# EAGLE board AC_PCB_schem_v70 (EAGLE 9.7.0)
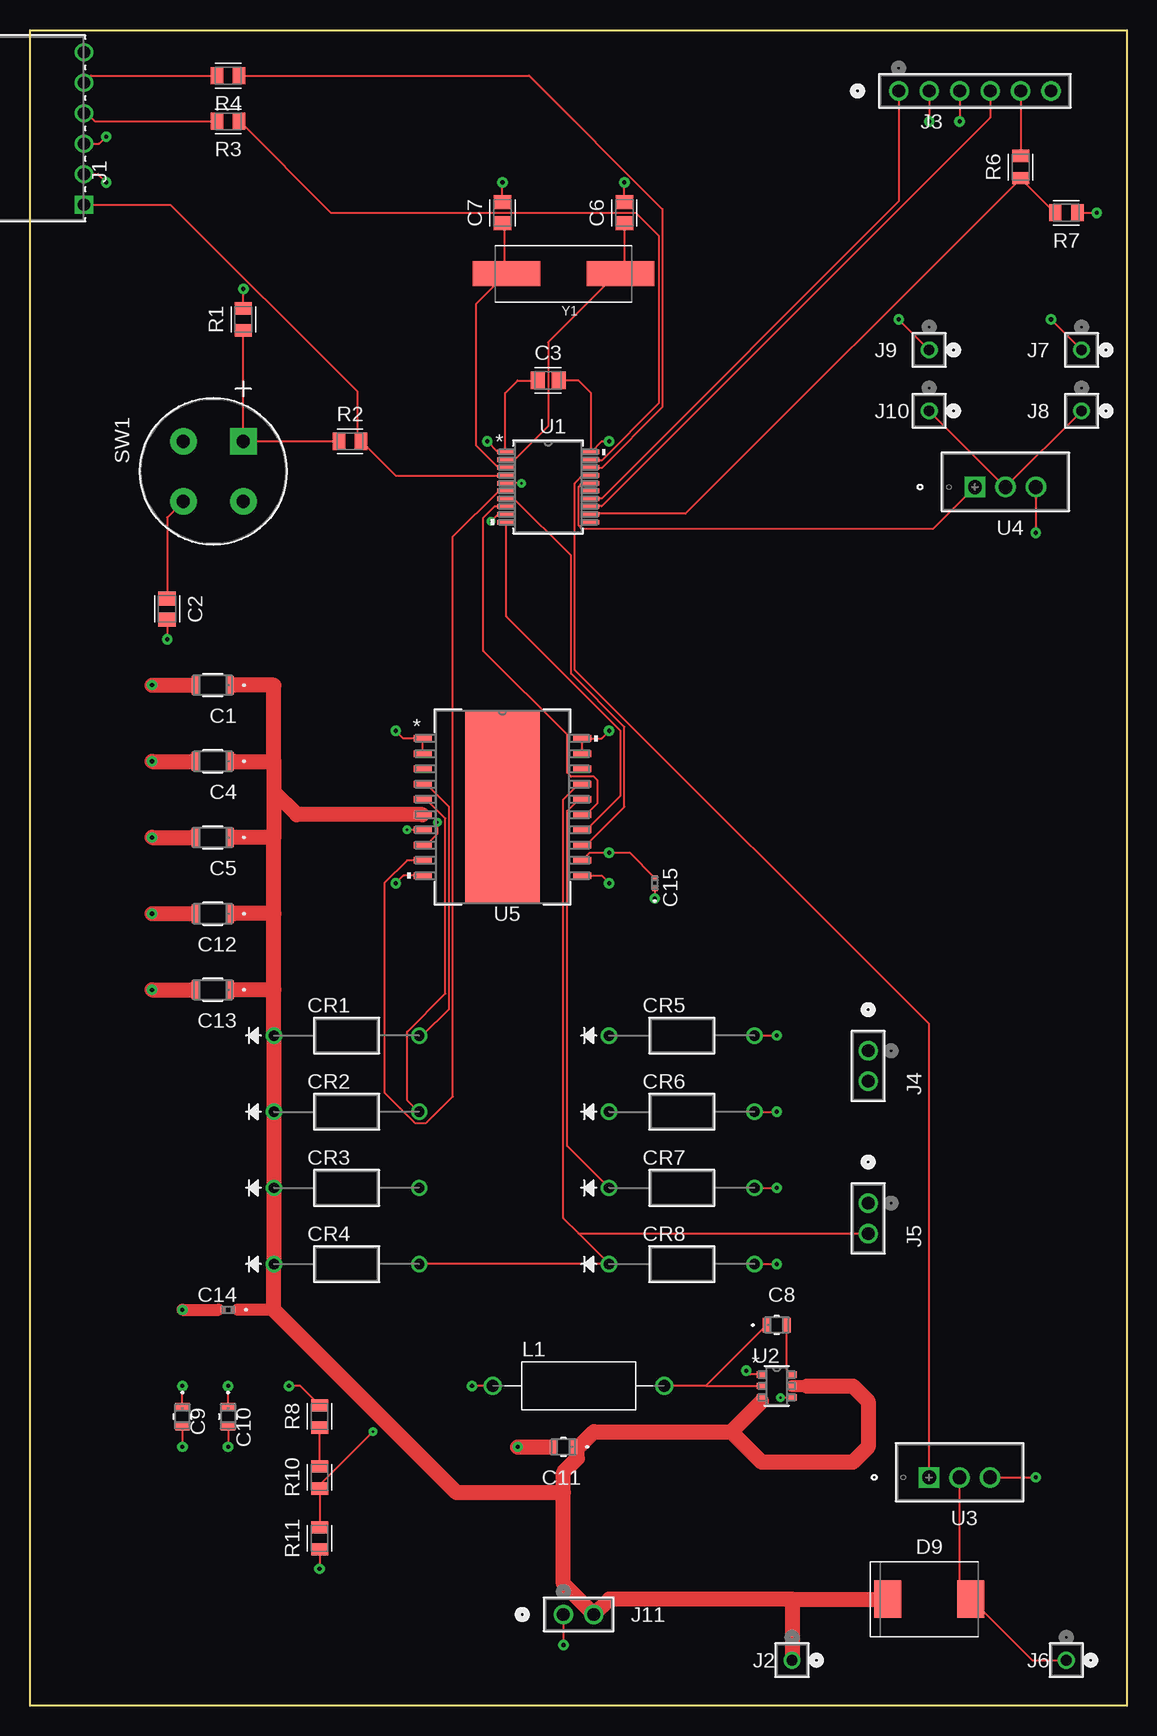
[diagram p0: board, top side]
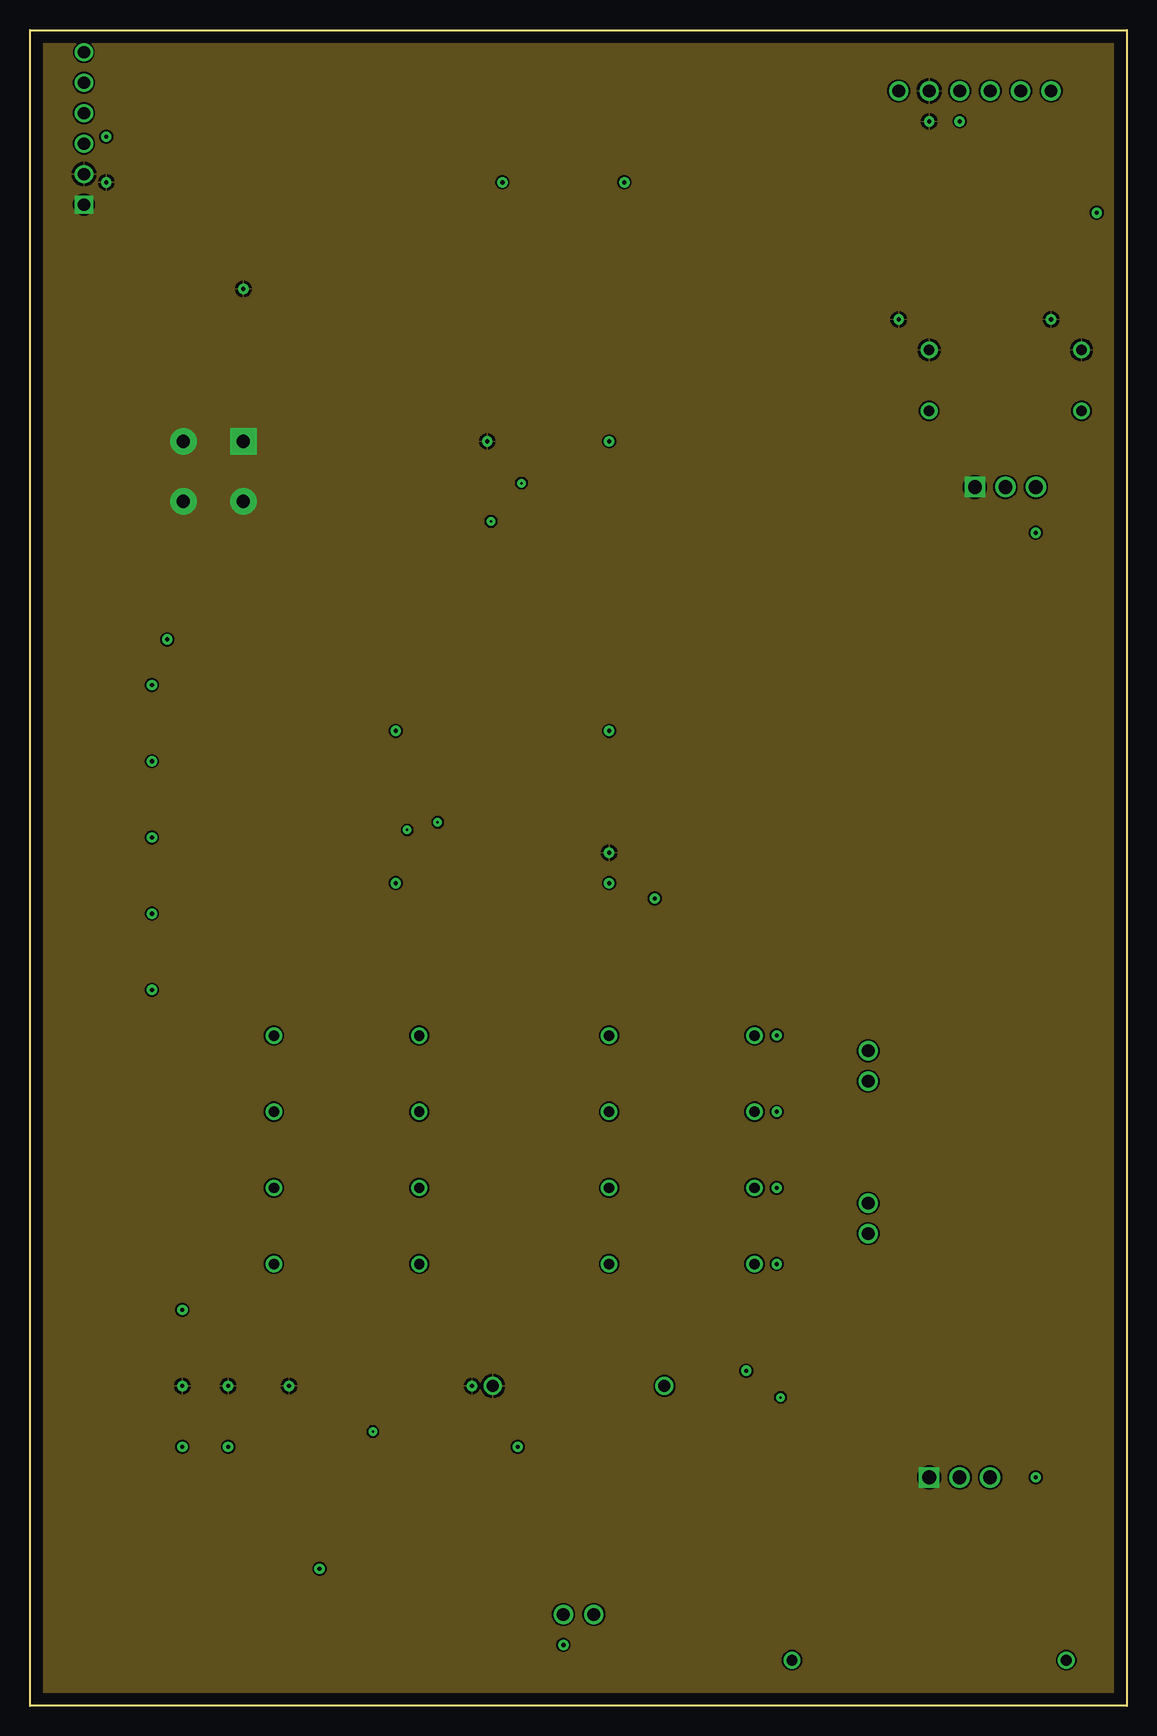
[diagram p1: board, inner layer P5V]
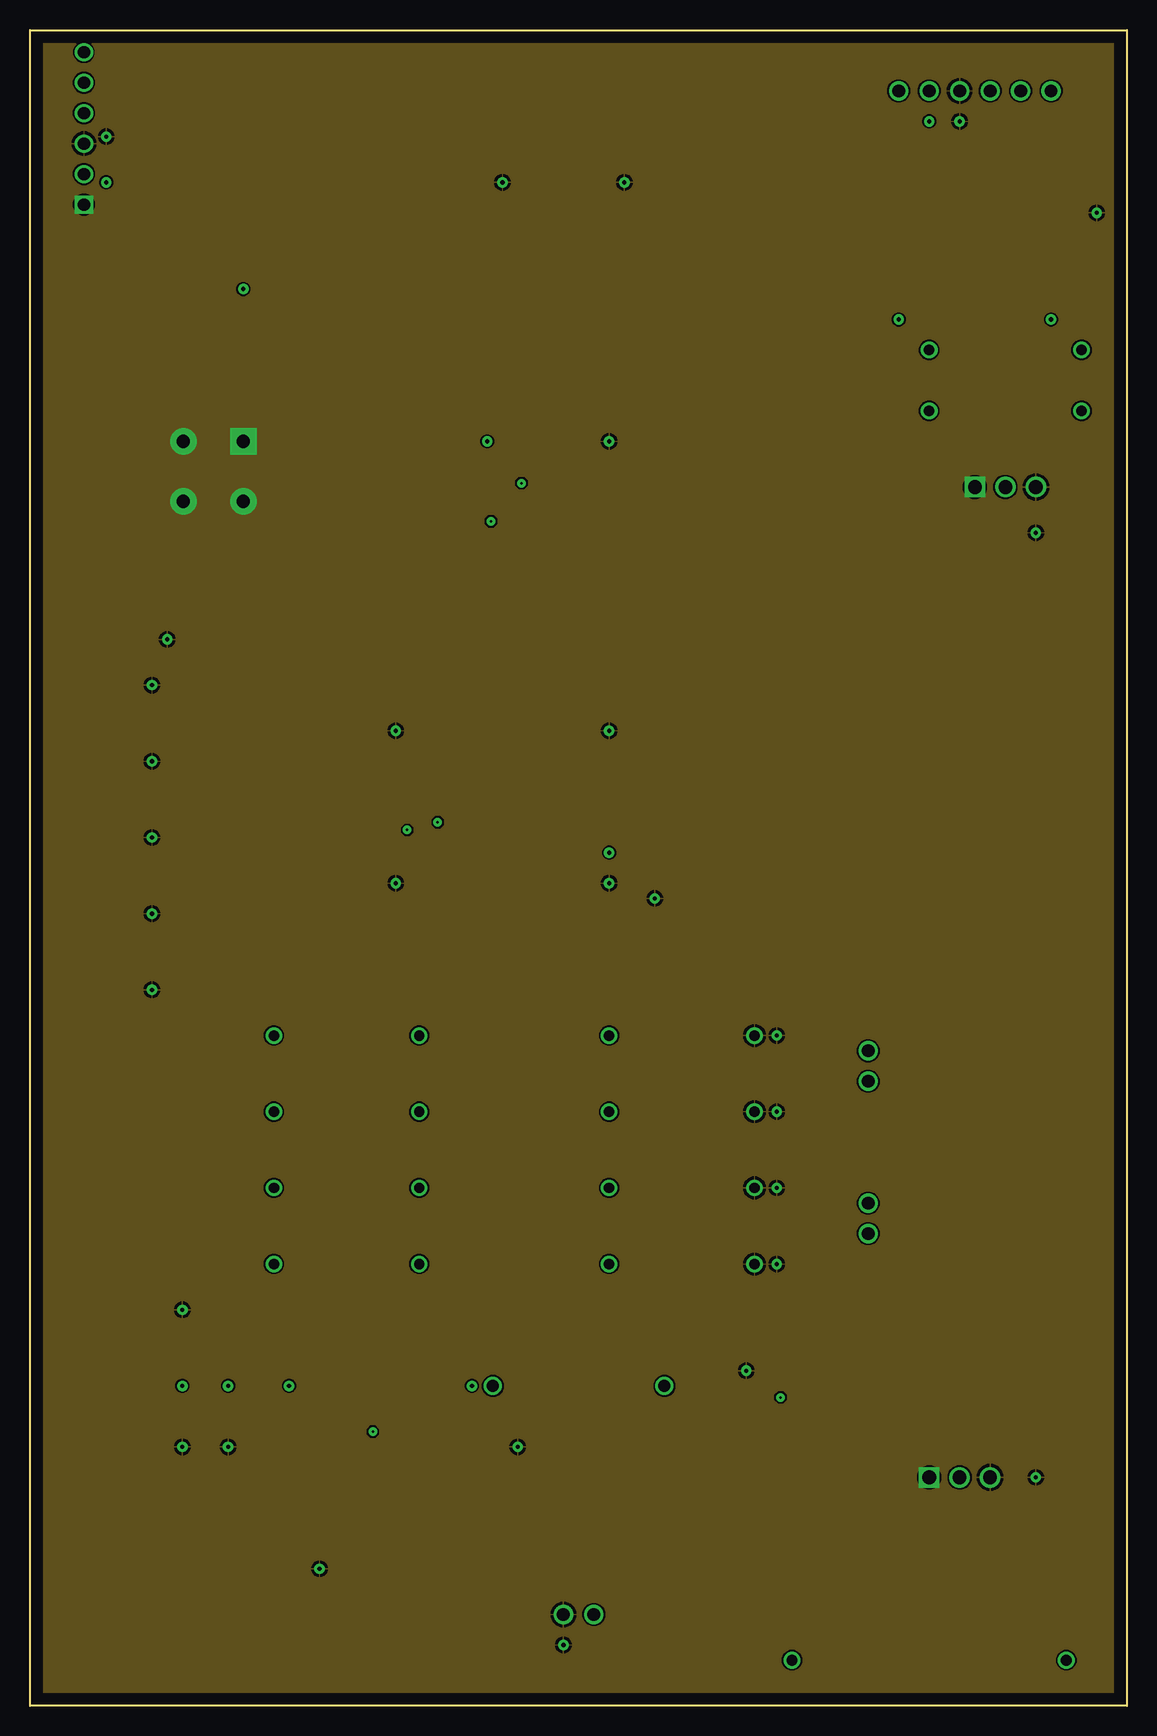
[diagram p2: board, inner layer GND]
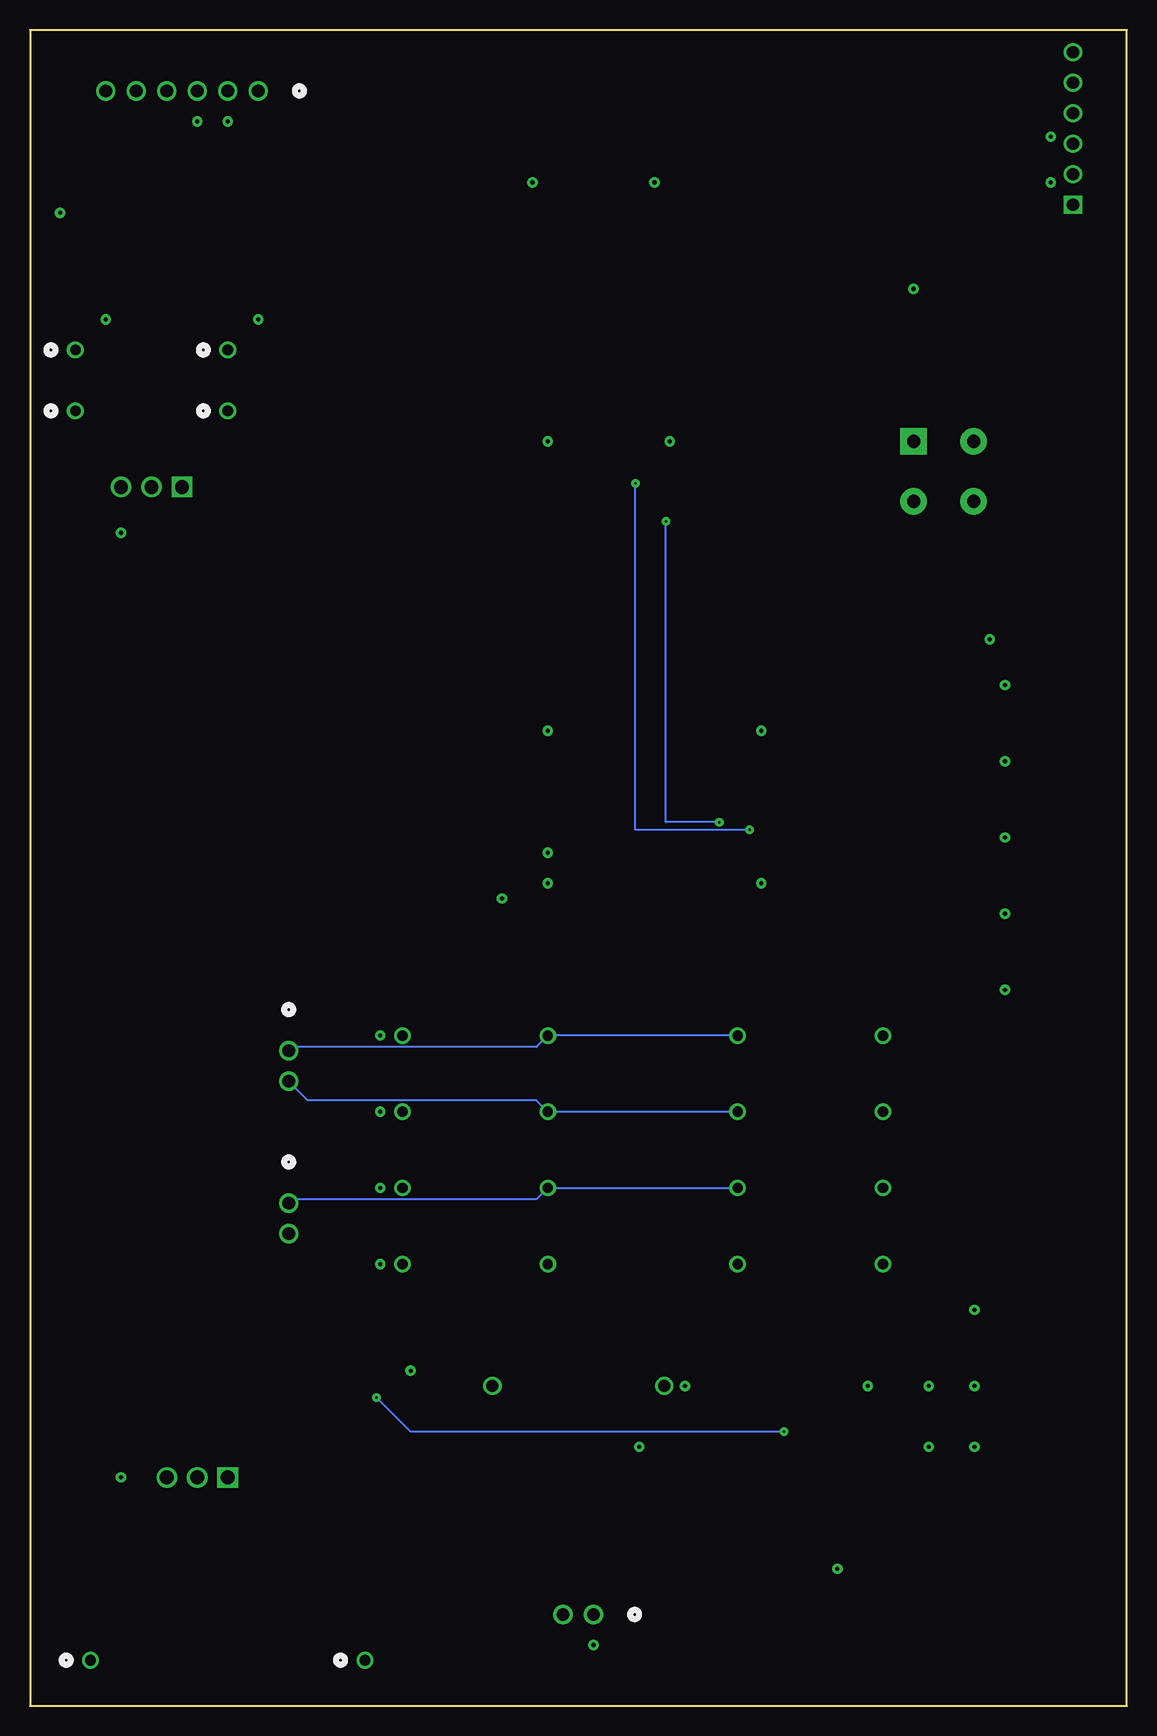
[diagram p3: board, bottom side, seen from below]

Size 91.41 x 139.7 mm. Coordinates in mm from the lower left corner, seen from the top.
Outline: 0,139.7 91.41,139.7 91.41,0 0,0 0,139.7
Copper layers (1*2*15*16): Top / P5V / GND / Bottom
Stack-up Default Layer Stack: Top User Defined 0.035559375mm / Dielectric-2 User Defined 1.5748mm / P5V User Defined 0.035559375mm / Dielectric-1 User Defined 1.5748mm / GND User Defined 0.035559375mm / Dielectric-3 User Defined 1.5748mm / Bottom User Defined 0.035559375mm
Design rules: minimum copper width 6mil, minimum drill size 8mil, copper clearance wire_polygon to wire_polygon 6mil, copper clearance wire_polygon to pad_smd 6mil, copper clearance wire_polygon to via 6mil, copper clearance pad_smd to pad_smd 6mil, copper clearance pad_smd to via 6mil, copper clearance via to via 6mil, copper clearance smd to pad (same net) 6mil, copper clearance smd to via (same net) 6mil, copper clearance smd to smd (same net) 6mil, dimension clearance 40mil, restrict clearance 0mil, drill distance 20mil, keepout clearance 0mil

## Footprints (pad centres in the part's own frame; a part is rotated, then mirrored left to right if it is on the bottom)
CAP_CL31_SAM-L = smd 0.652 x 1.549: 1 -1.426,0; 2 1.426,0
CAPC2012X110 = smd 1.165 x 1.465: 1 -0.875,0; 2 0.875,0
CAP_CL21_SAM-L = smd 0.652 x 1.199: 1 -0.826,0; 2 0.826,0
CAP_CL05_SAM-L = smd 0.402 x 0.449: 1 -0.451,0; 2 0.451,0
CR_H2R06_STM = drill 0.864 pad 1.372: 1 0,0; 2 12.116,0
DIOM7959X625N = smd 2.252 x 3.12: 1 -3.457,0; 2 3.457,0
CONN_PH1RB-06 = drill 1.016 pad 1.524 square: 1 0,0 | drill 1.016 pad 1.524: 2 2.54,0; 3 5.08,0; 4 7.62,0; 5 10.16,0; 6 12.7,0
CONN_SMC-1-01-1-GT_ADM = drill 0.889 pad 1.397: 1 0,0
CONN6_061LFBN-RC_SUL = drill 1.067 pad 1.321: 1 0,0; 2 2.54,0; 3 5.08,0; 4 7.62,0; 5 10.16,0; 6 12.7,0
CONN2_LFBN-RC_SUL = drill 1.067 pad 1.575: 1 0,0; 2 2.54,0
INDAD1430W80L950D400 = drill 1 pad 1.35: 1 -7.15,0; 2 7.15,0
RESC2012X65 = smd 1.031 x 1.42: 1 -0.919,0; 2 0.919,0
D6R_CNK = drill 1.092 pad 2.21 square: 1 0,0 | drill 1.092 pad 2.21: 2 0,-5; 3 5,-5; 4 5,0
SSOP20_SS_MCH-L = smd 1.346 x 0.381: 1 -3.581,2.925; 2 -3.581,2.275; 3 -3.581,1.625; 4 -3.581,0.975; 5 -3.581,0.325; 6 -3.581,-0.325; 7 -3.581,-0.975; 8 -3.581,-1.625; 9 -3.581,-2.275; 10 -3.581,-2.925; 11 3.581,-2.925; 12 3.581,-2.275; 13 3.581,-1.625; 14 3.581,-0.975; 15 3.581,-0.325; 16 3.581,0.325; 17 3.581,0.975; 18 3.581,1.625; 19 3.581,2.275; 20 3.581,2.925
SOT-23-THIN-6_DDC_TEX-L = smd 0.8 x 0.508: 1 -1.276,0.95; 2 -1.276,0; 3 -1.276,-0.95; 4 1.276,-0.95; 5 1.276,0; 6 1.276,0.95
TO-220_STM = drill 1.143 pad 1.651 square: 1 0,0 | drill 1.143 pad 1.651: 2 2.54,0; 3 5.08,0
POWERSO-20_STM-L = smd 1.499 x 0.533: 1 -6.655,5.715; 2 -6.655,4.445; 3 -6.655,3.175; 4 -6.655,1.905; 5 -6.655,0.635; 6 -6.655,-0.635; 7 -6.655,-1.905; 8 -6.655,-3.175; 9 -6.655,-4.445; 10 -6.655,-5.715; 11 6.655,-5.715; 12 6.655,-4.445; 13 6.655,-3.175; 14 6.655,-1.905; 15 6.655,-0.635; 16 6.655,0.635; 17 6.655,1.905; 18 6.655,3.175; 19 6.655,4.445; 20 6.655,5.715 | smd 6.198 x 16.002: EPAD 0,0
XTAL_ABLS-25.000MHZ-B4-F = smd 5.6 x 2.1: 1 -4.75,0; 2 4.75,0

## Placement (x,y rotation side)
C1  100 uF  [CAP_CL31_SAM-L]  15.24,85.09 180 top
C2  10nF  [CAPC2012X110]  11.43,91.44 270 top
C3  100nF  [CAPC2012X110]  43.18,110.49 0 top
C4  100 uF  [CAP_CL31_SAM-L]  15.24,78.74 180 top
C5  100 uF  [CAP_CL31_SAM-L]  15.24,72.39 180 top
C6  18pF  [CAPC2012X110]  49.53,124.46 90 top
C7  18pF  [CAPC2012X110]  39.37,124.46 90 top
C8  0.1 uF  [CAP_CL21_SAM-L]  62.23,31.75 0 top
C9  22 uF  [CAP_CL21_SAM-L]  12.7,24.13 270 top
C10  22 uF  [CAP_CL21_SAM-L]  16.51,24.13 270 top
C11  2.2 uF  [CAP_CL21_SAM-L]  44.45,21.59 180 top
C12  100 uF  [CAP_CL31_SAM-L]  15.24,66.04 180 top
C13  100 uF  [CAP_CL31_SAM-L]  15.24,59.69 180 top
C14  100nF  [CAP_CL05_SAM-L]  16.51,33.02 180 top
C15  100nF  [CAP_CL05_SAM-L]  52.07,68.58 90 top
CR1  STTH2R06CR_H2R06_STM  [CR_H2R06_STM]  20.32,55.88 0 top
CR2  STTH2R06CR_H2R06_STM  [CR_H2R06_STM]  20.32,49.53 0 top
CR3  STTH2R06CR_H2R06_STM  [CR_H2R06_STM]  20.32,43.18 0 top
CR4  STTH2R06CR_H2R06_STM  [CR_H2R06_STM]  20.32,36.83 0 top
CR5  STTH2R06CR_H2R06_STM  [CR_H2R06_STM]  48.26,55.88 0 top
CR6  STTH2R06CR_H2R06_STM  [CR_H2R06_STM]  48.26,49.53 0 top
CR7  STTH2R06CR_H2R06_STM  [CR_H2R06_STM]  48.26,43.18 0 top
CR8  STTH2R06CR_H2R06_STM  [CR_H2R06_STM]  48.26,36.83 0 top
D9  DIODE  [DIOM7959X625N]  74.93,8.89 0 top
J1  PH1RB-06-UACONN_PH1RB-06  [CONN_PH1RB-06]  4.5,125.15 90 top
J2  SMC-1-01-1-GTCONN_SMC-1-01-1-GT_ADM  [CONN_SMC-1-01-1-GT_ADM]  63.5,3.81 0 top
J3  PPTC061LFBN-RCCONN6_061LFBN-RC_SUL  [CONN6_061LFBN-RC_SUL]  72.39,134.62 0 top
J4  PPTC021LFBN-RCCONN2_LFBN-RC_SUL  [CONN2_LFBN-RC_SUL]  69.85,54.61 270 top
J5  PPTC021LFBN-RCCONN2_LFBN-RC_SUL  [CONN2_LFBN-RC_SUL]  69.85,41.91 270 top
J6  SMC-1-01-1-GTCONN_SMC-1-01-1-GT_ADM  [CONN_SMC-1-01-1-GT_ADM]  86.36,3.81 0 top
J7  SMC-1-01-1-GTCONN_SMC-1-01-1-GT_ADM  [CONN_SMC-1-01-1-GT_ADM]  87.63,113.03 0 top
J8  SMC-1-01-1-GTCONN_SMC-1-01-1-GT_ADM  [CONN_SMC-1-01-1-GT_ADM]  87.63,107.95 0 top
J9  SMC-1-01-1-GTCONN_SMC-1-01-1-GT_ADM  [CONN_SMC-1-01-1-GT_ADM]  74.93,113.03 0 top
J10  SMC-1-01-1-GTCONN_SMC-1-01-1-GT_ADM  [CONN_SMC-1-01-1-GT_ADM]  74.93,107.95 0 top
J11  PPTC021LFBN-RCCONN2_LFBN-RC_SUL  [CONN2_LFBN-RC_SUL]  44.45,7.62 0 top
L1  33 microH  [INDAD1430W80L950D400]  45.72,26.67 0 top
R1  20k  [RESC2012X65]  17.78,115.57 90 top
R2  200  [RESC2012X65]  26.67,105.41 0 top
R3  30  [RESC2012X65]  16.51,132.08 180 top
R4  30  [RESC2012X65]  16.51,135.89 180 top
R6  1000  [RESC2012X65]  82.55,128.27 90 top
R7  2000  [RESC2012X65]  86.36,124.46 180 top
R8  470  [RESC2012X65]  24.13,24.13 90 top
R10  100,000  [RESC2012X65]  24.13,19.05 90 top
R11  13700  [RESC2012X65]  24.13,13.97 90 top
SW1  D6R90F1LFSD6R_CNK  [D6R_CNK]  17.78,105.41 270 top
U1  PIC16F15243-I/SSSSOP20_SS_MCH-L  [SSOP20_SS_MCH-L]  43.18,101.6 0 top
U2  PLMR51420XDDCTSOT-23-THIN-6_DDC_TEX-L  [SOT-23-THIN-6_DDC_TEX-L]  62.23,26.67 0 top
U3  TIP102TO-220_STM  [TO-220_STM]  74.93,19.05 0 top
U4  TIP102TO-220_STM  [TO-220_STM]  78.74,101.6 0 top
U5  L298P013TRPOWERSO-20_STM-L  [POWERSO-20_STM-L]  39.37,74.93 0 top
Y1  ABLS-25.000MHZ-B4-F  [XTAL_ABLS-25.000MHZ-B4-F]  44.45,119.38 0 top

## Library data of the parts
C1 C4 C5 C12 C13 = 2023-12-01_22-21-38_Library; COPYRIGHT: Copyright (C) 2023 Ultra Librarian. All rights reserved.; MANUFACTURER_PART_NUMBER: CL31A107MQHNNNE; MFR_NAME: Samsung
C2 C3 C6 C7 = Capacitor; CATEGORY: Capacitor
C8-C11 = Ceramic Cap; COPYRIGHT: Copyright (C) 2023 Ultra Librarian. All rights reserved.; MANUFACTURER_PART_NUMBER: CL21A226MQQNNNE; MFR_NAME: Samsung
C14 C15 = 2023-12-01_23-17-33_Library; COPYRIGHT: Copyright (C) 2023 Ultra Librarian. All rights reserved.; MANUFACTURER_PART_NUMBER: CL05A104KA5NNNC; MFR_NAME: Samsung
CR1-CR8 = 2023-11-30_20-08-36_Library; COPYRIGHT: Copyright (C) 2023 Ultra Librarian. All rights reserved.; MANUFACTURER_PART_NUMBER: STTH2R06; MFR_NAME: STMicroelectronics
D9 = Diode; CATEGORY: Diode; SUB-CATEGORY: Rectifier
J1 = 2023-12-02_00-15-31_Library; COPYRIGHT: Copyright (C) 2023 Ultra Librarian. All rights reserved.; MANUFACTURER_PART_NUMBER: PH1RB-06-UA; MFR_NAME: ADAM TECHNOLOGIES INC
J2 J6-J10 = 2023-12-01_05-05-23_Library; COPYRIGHT: Copyright (C) 2023 Ultra Librarian. All rights reserved.; MANUFACTURER_PART_NUMBER: SMC-1-01-1-GT; MFR_NAME: ADAM TECHNOLOGIES INC
J3 = 2023-12-01_22-14-30_Library; COPYRIGHT: Copyright (C) 2023 Ultra Librarian. All rights reserved.; MANUFACTURER_PART_NUMBER: PPTC061LFBN-RC; MFR_NAME: Sullins
J4 J5 J11 = 2023-12-02_00-02-02_Library; COPYRIGHT: Copyright (C) 2023 Ultra Librarian. All rights reserved.; MANUFACTURER_PART_NUMBER: PPTC021LFBN-RC; MFR_NAME: Sullins
L1 = B78108E1333J000; CHECK_PRICES: https://www.snapeda.com/parts/B78108E1333J000/EPCOS/view-part/?ref=eda; DESCRIPTION: 33 µH Unshielded Drum Core, Wirewound Inductor 1.05 A 550mOhm Max Axial; DIGIKEY_PART_NUMBER: 495-6946-2-ND; MF: EPCOS; MP: B78108E1333J000; PACKAGE: None; PURCHASE-URL: https://www.snapeda.com/api/url_track_click_mouser/?unipart_id=1650699&manufacturer=EPCOS&part_name=B78108E1333J000&search_term=None; SNAPEDA_LINK: https://www.snapeda.com/parts/B78108E1333J000/EPCOS/view-part/?ref=snap
R1-R4 R6-R8 R10 R11 = Resistor; CATEGORY: Resistor; SUB-CATEGORY: Fixed
SW1 = button; COPYRIGHT: Copyright (C) 2023 Ultra Librarian. All rights reserved.; MANUFACTURER_PART_NUMBER: D6R90F1LFS; MFR_NAME: C&K Components
U1 = 2023-10-20_19-59-51_Library; COPYRIGHT: Copyright (C) 2023 Ultra Librarian. All rights reserved.; MANUFACTURER_PART_NUMBER: PIC16F15243-I/SS; MFR_NAME: Microchip
U2 = Voltage Regulator; COPYRIGHT: Copyright (C) 2023 Ultra Librarian. All rights reserved.; MANUFACTURER_PART_NUMBER: PLMR51420XDDCT; MFR_NAME: Texas Instruments
U3 U4 = 2023-11-17_21-15-26_Library; COPYRIGHT: Copyright (C) 2023 Ultra Librarian. All rights reserved.; MANUFACTURER_PART_NUMBER: TIP102; MFR_NAME: STMicroelectronics
U5 = 2023-12-01_16-25-38_Library; COPYRIGHT: Copyright (C) 2023 Ultra Librarian. All rights reserved.; MANUFACTURER_PART_NUMBER: L298P013TR; MFR_NAME: STMicroelectronics
Y1 = ABLS-25.000MHZ-B4-F; CHECK_PRICES: https://www.snapeda.com/parts/ABLS-25.000MHZ-B4-F/Abracon/view-part/?ref=eda; DESCRIPTION: HC/49US (AT49) SMD LOW PROFILE CRYSTAL; MF: Abracon Corporation; MP: ABLS-25.000MHZ-B4-F; PACKAGE: None; SNAPEDA_LINK: https://www.snapeda.com/parts/ABLS-25.000MHZ-B4-F/Abracon/view-part/?ref=snap

## Nets
GND: C1.2 C2.2 C3.2 C4.2 C5.2 C6.2 C7.2 C9.2 C10.2 C11.2 C12.2 C13.2 C14.2 C15.1 CR5.2 CR6.2 CR7.2 CR8.2 J1.3 J3.3 J11.1 R7.1 R11.1 U1.20 U2.1 U3.3 U4.3 U5.1 U5.2 U5.10 U5.11 U5.19 U5.20
N$2: J3.5 R6.2
N$3: J3.4 U1.13
N$4: J3.1 U1.14
N$5: U1.5 U5.7
N$6: U1.6 U5.9
N$7: U1.9 U5.8
N$9: U1.7 U5.13
N$10: U1.10 U5.14
N$11: CR2.2 CR6.1 J4.2 U5.5
N$12: U1.17 U3.1
N$13: C2.1 SW1.3
N$14: CR1.2 CR5.1 J4.1 U5.4
N$15: C6.1 U1.2 Y1.2
N$16: CR3.2 CR7.1 J5.1 U5.16
N$17: CR4.2 CR8.1 J5.2 U5.17
N$18: R10.1 R11.2 U2.4
N$20: R1.1 R2.1 SW1.1
N$21: J1.1 R2.2 U1.4
N$22: J1.4 R3.2
N$23: J1.5 R4.2
N$24: R3.1 U1.19
N$25: R4.1 U1.18
N$26: U1.16 U4.1
N$27: C8.2 U2.6
N$28: C8.1 L1.2 U2.2
N$29: C7.1 U1.3 Y1.1
N$31: D9.2 J6.1 U3.2
N$32: R6.1 R7.2 U1.12
N$33: J8.1 J10.1 U4.2
N$34: R8.1 R10.2
N$35: U1.8 U5.15
P5V: C3.1 C9.1 C10.1 C15.2 J1.2 J3.2 J7.1 J9.1 L1.1 R1.2 R8.2 U1.1 U5.12
P12.8V: C1.1 C4.1 C5.1 C11.1 C12.1 C13.1 C14.1 CR1.1 CR2.1 CR3.1 CR4.1 D9.1 J2.1 J11.2 U2.3 U2.5 U5.6

## Tracks (layer width: path | path; a pad name or v marks a point on that pad's centre or on a via)
GND  (via drill 0.35)
  Top 0.152: U5.10 31.12,69.22 v30.48,68.58 | U5.11 47.62,69.22 v48.26,68.58 | v48.26,81.28 47.62,80.64 U5.20 U5.19 | v30.48,81.28 31.12,80.64 U5.1 U5.2 | J11.1 v44.45,5.08 | C9.2 v12.7,21.59 | C10.2 v16.51,21.59 | R11.1 v24.13,11.43 | U3.3 v83.82,19.05 | CR5.2 v62.23,55.88 | CR6.2 v62.23,49.53 | CR7.2 v62.23,43.18 | CR8.2 v62.23,36.83 | v48.26,105.41 47.65,105.41 U1.20 46.76,109.45 45.72,110.49 C3.2 | U4.3 v83.82,97.79 | J1.3 5.77,130.23 v6.35,130.81 | C7.2 v39.37,127 | C6.2 v49.53,127 | R7.1 v88.9,124.46 | J3.3 v77.47,132.08 | C2.2 v11.43,88.9 | U2.1 60.01,27.62 v59.69,27.94 | C15.1 v52.07,67.31 | 15.73,33.02 C14.2 | C11.2 43.29,21.59 | C13.2 13.48,59.69 | C12.2 13.48,66.04 | C5.2 13.48,72.39 | C4.2 13.48,78.74 | C1.2 13.48,85.09
  Top 1.016: v12.7,33.02 15.73,33.02
  Top 1.27: v10.16,85.09 13.48,85.09 | v10.16,78.74 13.48,78.74 | v10.16,72.39 13.48,72.39 | v10.16,66.04 13.48,66.04 | v10.16,59.69 13.48,59.69 | v40.64,21.59 43.29,21.59
  pour GND: 0,139.7 0,0 91.44,0 91.44,139.7
N$2
  Top 0.152: J3.5 R6.2
N$3
  Top 0.152: J3.4 80.01,132.4 47.62,100.01 46.99,100.01 U1.13
N$4
  Top 0.152: J3.1 72.39,125.41 47.62,100.65 46.99,100.65 U1.14
N$5  (via drill 0.2)
  Top 0.152: v40.96,101.92 39.69,101.92 U1.5 | U5.7 v31.43,73.02
  Bottom 0.152: v40.96,101.92 40.96,73.02 v31.43,73.02
N$6
  Top 0.152: U5.9 31.43,70.48 29.53,68.58 29.53,51.12 32.07,48.58 33.02,48.58 35.24,50.8 35.24,97.47 39.05,101.28 39.37,101.28 U1.6
N$7  (via drill 0.2)
  Top 0.152: v38.42,98.74 39.05,99.38 39.37,99.38 U1.9 | v33.97,73.66 33.97,72.71 33.02,71.75 U5.8
  Bottom 0.152: v38.42,98.74 38.42,73.66 v33.97,73.66
N$9
  Top 0.152: U5.13 46.36,71.75 49.53,74.93 49.53,81.6 45.09,86.04 45.09,95.88 40.32,100.65 39.69,100.65 U1.7
N$10
  Top 0.152: U5.14 46.36,73.02 49.21,75.88 49.21,81.28 39.69,90.8 39.69,98.74 U1.10
N$11
  Top 0.152: U5.5 33.02,75.56 34.61,73.98 34.61,59.37 31.43,56.2 31.43,50.48 32.38,49.53 CR2.2
  Bottom 0.152: CR2.2 CR6.1 49.21,50.48 68.26,50.48 J4.2
N$12
  Top 0.152: U3.1 74.93,56.83 45.4,86.36 45.4,101.92 46.04,102.55 46.67,102.55 U1.17
N$13
  Top 0.152: C2.1 11.43,99.06 SW1.3
N$14
  Top 0.152: U5.4 33.02,76.83 34.93,74.93 34.93,58.1 32.7,55.88 CR1.2
  Bottom 0.152: CR1.2 CR5.1 49.21,54.93 69.53,54.93 J4.1
N$15
  Top 0.152: C6.1 49.53,119.71 Y1.2 48.9,119.38 43.18,113.66 43.18,106.68 40.32,103.82 39.69,103.82 U1.2
N$16
  Top 0.152: CR7.1 44.77,46.67 44.77,74.61 45.72,75.56 U5.16
  Bottom 0.152: CR3.2 CR7.1 49.21,42.23 69.53,42.23 J5.1
N$17
  Top 0.152: 45.72,39.37 CR8.1 CR4.2 | 45.72,39.37 44.45,40.64 44.45,75.56 45.72,76.83 U5.17 | 45.72,39.37 J5.2
N$18  (via drill 0.2)
  Top 0.152: R11.2 R10.1 24.13,18.41 v28.57,22.86 | v62.55,25.72 U2.4
  Bottom 0.152: v62.55,25.72 59.69,22.86 v28.57,22.86
N$20
  Top 0.152: R1.1 SW1.1 R2.1
N$21
  Top 0.152: U1.4 39.37,102.55 30.48,102.55 27.62,105.41 R2.2 27.3,105.41 27.3,109.54 11.75,125.09 4.76,125.09 J1.1
N$22
  Top 0.152: R3.2 5.4,132.08 4.76,132.72 J1.4
N$23
  Top 0.152: R4.2 5.08,135.89 J1.5
N$24
  Top 0.152: U1.19 46.99,103.82 47.62,103.82 52.39,108.58 52.39,122.55 50.48,124.46 25.08,124.46 17.46,132.08 R3.1
N$25
  Top 0.152: R4.1 41.59,135.89 52.7,124.78 52.7,108.27 47.62,103.19 46.99,103.19 U1.18
N$26
  Top 0.152: U4.1 75.25,98.11 46.04,98.11 45.72,98.42 45.72,101.6 46.04,101.92 46.67,101.92 U1.16
N$27
  Top 0.152: U2.6 63.06,28.07 C8.2
N$28
  Top 0.152: 56.32,26.67 C8.1 | 56.32,26.67 L1.2 | 56.32,26.67 U2.2
N$29
  Top 0.152: C7.1 39.54,123.42 39.54,119.22 Y1.1 39.37,119.06 37.15,116.84 37.15,105.09 39.05,103.19 39.37,103.19 U1.3
N$31
  Top 0.152: J6.1 83.5,3.81 78.42,8.89 D9.2 78.1,8.89 77.47,9.52 U3.2
N$32
  Top 0.152: 82.55,127.32 54.61,99.38 46.99,99.38 U1.12 | 82.55,127.32 85.41,124.46 R7.2 | 82.55,127.32 R6.1
N$33
  Top 0.152: J10.1 U4.2 J8.1
N$34
  Top 0.152: R10.2 R8.1
N$35
  Top 0.152: U5.15 46.36,74.29 47.31,75.25 47.31,77.15 46.99,77.47 45.09,77.47 44.77,77.79 44.77,80.96 37.78,87.95 37.78,99.06 38.73,100.01 39.37,100.01 U1.8
P5V  (via drill 0.35)
  Top 0.152: v38.1,105.41 38.98,104.52 U1.1 39.6,109.45 40.64,110.49 C3.1 | U5.12 46.66,71.12 v48.26,71.12 49.98,71.12 C15.2 | J1.2 5.66,127.69 v6.35,127 | J3.2 v74.93,132.08 | J9.1 v72.39,115.57 | J7.1 v85.09,115.57 | R1.2 v17.78,118.11 | L1.1 v36.83,26.67 | C9.1 v12.7,26.67 | C10.1 v16.51,26.67 | R8.2 22.51,26.67 v21.59,26.67
  pour P5V: 0,139.7 0,0 91.44,0 91.44,139.7
P12.8V
  Top 0.152: 17.29,33.02 C14.1 | C5.1 17,72.39 | U2.3 60.96,25.4 | C11.1 45.4,21.59 45.61,21.48 | C13.1 17,59.69 | C12.1 17,66.04 | C4.1 17,78.74 | C1.1 17,85.09
  Top 1.016: 20.32,33.02 17.29,33.02 | U2.5 64.77,26.67
  Top 1.27: 63.5,8.89 48.26,8.89 J11.2 44.45,10.16 44.45,17.78 | 63.5,8.89 D9.1 | 63.5,8.89 J2.1 | 44.45,17.78 44.45,19.46 45.61,20.63 45.61,21.48 46.99,22.86 58.42,22.86 | 58.42,22.86 60.96,25.4 | 58.42,22.86 60.96,20.32 68.58,20.32 69.85,21.59 69.85,25.4 68.58,26.67 64.77,26.67 | 20.32,59.69 CR1.1 CR2.1 CR3.1 CR4.1 20.32,33.02 35.56,17.78 44.45,17.78 | 20.32,59.69 17,59.69 | 20.32,59.69 20.32,66.04 | 20.32,66.04 17,66.04 | 20.32,66.04 20.32,72.39 | 20.32,72.39 17,72.39 | 20.32,78.74 20.32,76.2 | 20.32,76.2 20.32,72.39 | 17,78.74 20.32,78.74 | 20.32,78.74 20.32,85.09 17,85.09 | U5.6 22.23,74.29 20.32,76.2